# EAGLE board DOUTx3 (EAGLE 7.3.0)

Size 100 x 80 mm. Coordinates in mm from the lower left corner, seen from the top.
Outline: 0,0 100,0 100,80 0,80 0,0
Copper layers (1*16): Top 0.035mm / dielectric 1.5mm / Bottom 0.035mm
Design rules "default": minimum track width 10mil, minimum drill 24mil, track to track 8mil, track to pad 8mil, pad to pad 8mil, via to via 8mil, smd to smd 8mil, copper to edge 40mil, drill to drill 8mil, minimum pad ring 10mil, minimum via ring 8mil, stop-mask expansion 4mil, vias tented up to drill 0mil, thermal gap 10mil

## Footprints (pad centres in the part's own frame; a part is rotated, then mirrored left to right if it is on the bottom)
E2,5-5 = drill 0.813 pad 1.6: + -1.27,0 | drill 0.813 pad 1.6 octagon: - 1.27,0
C025-030X050 = drill 0.813 octagon: 1 -1.27,0; 2 1.27,0
DIL16 = drill 0.813 long: 1 -8.89,-3.81; 2 -6.35,-3.81; 3 -3.81,-3.81; 4 -1.27,-3.81; 5 1.27,-3.81; 6 3.81,-3.81; 7 6.35,-3.81; 8 8.89,-3.81; 9 8.89,3.81; 10 6.35,3.81; 11 3.81,3.81; 12 1.27,3.81; 13 -1.27,3.81; 14 -3.81,3.81; 15 -6.35,3.81; 16 -8.89,3.81
JP1 = drill 0.914 long: 1 0,-1.27; 2 0,1.27
JP2 = drill 0.914 long: 1 -2.54,0; 2 0,0; 3 2.54,0
JP4 = drill 0.914 long: 1 -3.81,0; 2 -1.27,0; 3 1.27,0; 4 3.81,0
0207/2V = drill 0.813 octagon: 1 -1.27,0; 2 1.27,0

## Placement (x,y rotation side)
C1  100µF  [E2,5-5]  -40.64,-3.81 0 top  (outside the outline)
C2  100nF  [C025-030X050]  -39.37,-11.43 0 top  (outside the outline)
C3  [C025-030X050]  -39.37,-17.78 0 top  (outside the outline)
C4  [C025-030X050]  -39.37,-24.13 0 top  (outside the outline)
C5  100nF  [C025-030X050]  -49.53,-57.15 0 top  (outside the outline)
C6  100nF  [C025-030X050]  -49.53,-88.9 0 top  (outside the outline)
IC1  74HC595N  [DIL16]  -24.13,6.35 0 top  (outside the outline)
IC2  74HC595N  [DIL16]  -39.37,-46.99 0 top  (outside the outline)
IC3  74HC595N  [DIL16]  -39.37,-78.74 0 top  (outside the outline)
JP1  [JP1]  -26.67,24.13 0 top  (outside the outline)
JP2  [JP2]  -48.26,-20.32 0 top  (outside the outline)
JP3  [JP2]  -17.78,16.51 0 top  (outside the outline)
JP4  [JP2]  -26.67,16.51 0 top  (outside the outline)
JP5  [JP4]  -45.72,-29.21 0 top  (outside the outline)
JP6  [JP4]  -45.72,-36.83 0 top  (outside the outline)
JP7  [JP4]  -40.64,-57.15 0 top  (outside the outline)
JP8  [JP4]  -29.21,-57.15 0 top  (outside the outline)
JP9  [JP4]  -40.64,-88.9 0 top  (outside the outline)
JP10  [JP4]  -29.21,-88.9 0 top  (outside the outline)
R1  220  [0207/2V]  -40.64,22.86 0 top  (outside the outline)
R2  220  [0207/2V]  -16.51,30.48 0 top  (outside the outline)
R3  220  [0207/2V]  -22.86,30.48 0 top  (outside the outline)
R4  220  [0207/2V]  -29.21,30.48 0 top  (outside the outline)
R5  220  [0207/2V]  -35.56,30.48 0 top  (outside the outline)
R6  220  [0207/2V]  -16.51,36.83 0 top  (outside the outline)
R7  220  [0207/2V]  -22.86,36.83 0 top  (outside the outline)
R8  220  [0207/2V]  -29.21,36.83 0 top  (outside the outline)
R9  220  [0207/2V]  -30.48,-69.85 0 top  (outside the outline)
R10  220  [0207/2V]  -49.53,-63.5 0 top  (outside the outline)
R11  220  [0207/2V]  -43.18,-63.5 0 top  (outside the outline)
R12  220  [0207/2V]  -36.83,-63.5 0 top  (outside the outline)
R13  220  [0207/2V]  -30.48,-63.5 0 top  (outside the outline)
R14  220  [0207/2V]  -49.53,-69.85 0 top  (outside the outline)
R15  220  [0207/2V]  -43.18,-69.85 0 top  (outside the outline)
R16  220  [0207/2V]  -36.83,-69.85 0 top  (outside the outline)
R17  220  [0207/2V]  -49.53,-95.25 0 top  (outside the outline)
R18  220  [0207/2V]  -43.18,-95.25 0 top  (outside the outline)
R19  220  [0207/2V]  -36.83,-95.25 0 top  (outside the outline)
R20  220  [0207/2V]  -30.48,-95.25 0 top  (outside the outline)
R21  220  [0207/2V]  -49.53,-101.6 0 top  (outside the outline)
R22  220  [0207/2V]  -43.18,-101.6 0 top  (outside the outline)
R23  220  [0207/2V]  -36.83,-101.6 0 top  (outside the outline)
R24  220  [0207/2V]  -30.48,-101.6 0 top  (outside the outline)

## Library data of the parts
C1-C6 R1-R24 = rcl
IC1-IC3 = 74xx-eu
JP1-JP10 = jumper

## Nets
+5V: C1.+ C2.1 C5.1 C6.1 IC1.10 IC1.16 IC2.10 IC2.16 IC3.10 IC3.16 JP1.1 JP2.1
GND: C1.- C2.2 C5.2 C6.2 IC1.8 IC1.13 IC2.8 IC2.13 IC3.8 IC3.13 JP1.2 JP2.2 JP2.3
N$1: IC1.15 R1.1
N$2: IC1.1 R2.1
N$3: IC1.2 R3.1
N$4: IC1.3 R4.1
N$5: IC1.4 R5.1
N$6: IC1.5 R6.1
N$7: IC1.6 R7.1
N$8: IC1.7 R8.1
N$9: IC1.12 IC2.12 IC3.12 JP3.1 JP4.1
N$10: JP5.1 R1.2
N$11: JP5.2 R2.2
N$12: JP5.3 R3.2
N$13: JP5.4 R4.2
N$14: JP6.1 R5.2
N$15: JP6.2 R6.2
N$16: JP6.3 R7.2
N$17: JP6.4 R8.2
N$18: IC1.11 IC2.11 IC3.11 JP3.2 JP4.2
N$19: IC1.14 JP3.3
N$20: IC2.15 R9.1
N$21: IC2.1 R10.1
N$22: IC2.2 R11.1
N$23: IC2.3 R12.1
N$24: IC2.4 R13.1
N$25: IC2.5 R14.1
N$26: IC2.6 R15.1
N$27: IC2.7 R16.1
N$28: JP7.1 R9.2
N$29: JP7.2 R10.2
N$30: JP7.3 R11.2
N$31: JP7.4 R12.2
N$32: JP8.1 R13.2
N$33: JP8.2 R14.2
N$34: JP8.3 R15.2
N$35: JP8.4 R16.2
N$36: IC3.15 R17.1
N$37: IC3.1 R18.1
N$38: IC3.2 R19.1
N$39: IC3.3 R20.1
N$40: IC3.4 R21.1
N$41: IC3.5 R22.1
N$42: IC3.6 R23.1
N$43: IC3.7 R24.1
N$44: JP9.1 R17.2
N$45: JP9.2 R18.2
N$46: JP9.3 R19.2
N$47: JP9.4 R20.2
N$48: JP10.1 R21.2
N$49: JP10.2 R22.2
N$50: JP10.3 R23.2
N$51: JP10.4 R24.2
N$52: IC1.9 IC2.14
N$53: IC2.9 IC3.14
N$54: IC3.9 JP4.3

## Tracks (layer width: path | path; a pad name or v marks a point on that pad's centre or on a via)
+5V  (11 unrouted)
GND  (12 unrouted)
N$1  (1 unrouted)
N$2  (1 unrouted)
N$3  (1 unrouted)
N$4  (1 unrouted)
N$5  (1 unrouted)
N$6  (1 unrouted)
N$7  (1 unrouted)
N$8  (1 unrouted)
N$9  (4 unrouted)
N$10  (1 unrouted)
N$11  (1 unrouted)
N$12  (1 unrouted)
N$13  (1 unrouted)
N$14  (1 unrouted)
N$15  (1 unrouted)
N$16  (1 unrouted)
N$17  (1 unrouted)
N$18  (4 unrouted)
N$19  (1 unrouted)
N$20  (1 unrouted)
N$21  (1 unrouted)
N$22  (1 unrouted)
N$23  (1 unrouted)
N$24  (1 unrouted)
N$25  (1 unrouted)
N$26  (1 unrouted)
N$27  (1 unrouted)
N$28  (1 unrouted)
N$29  (1 unrouted)
N$30  (1 unrouted)
N$31  (1 unrouted)
N$32  (1 unrouted)
N$33  (1 unrouted)
N$34  (1 unrouted)
N$35  (1 unrouted)
N$36  (1 unrouted)
N$37  (1 unrouted)
N$38  (1 unrouted)
N$39  (1 unrouted)
N$40  (1 unrouted)
N$41  (1 unrouted)
N$42  (1 unrouted)
N$43  (1 unrouted)
N$44  (1 unrouted)
N$45  (1 unrouted)
N$46  (1 unrouted)
N$47  (1 unrouted)
N$48  (1 unrouted)
N$49  (1 unrouted)
N$50  (1 unrouted)
N$51  (1 unrouted)
N$52  (1 unrouted)
N$53  (1 unrouted)
N$54  (1 unrouted)